# Altium PCB ECE315.PcbDoc (part 2 of 2)
Units mm, origin at the board's own origin, x right, y up, seen from the top; angles counter-clockwise.
Board outline 100.25 x 100.25 mm, 2 copper layers (Top Layer, Bottom Layer); 67 components, 52 nets, 224 pads, 194 vias.
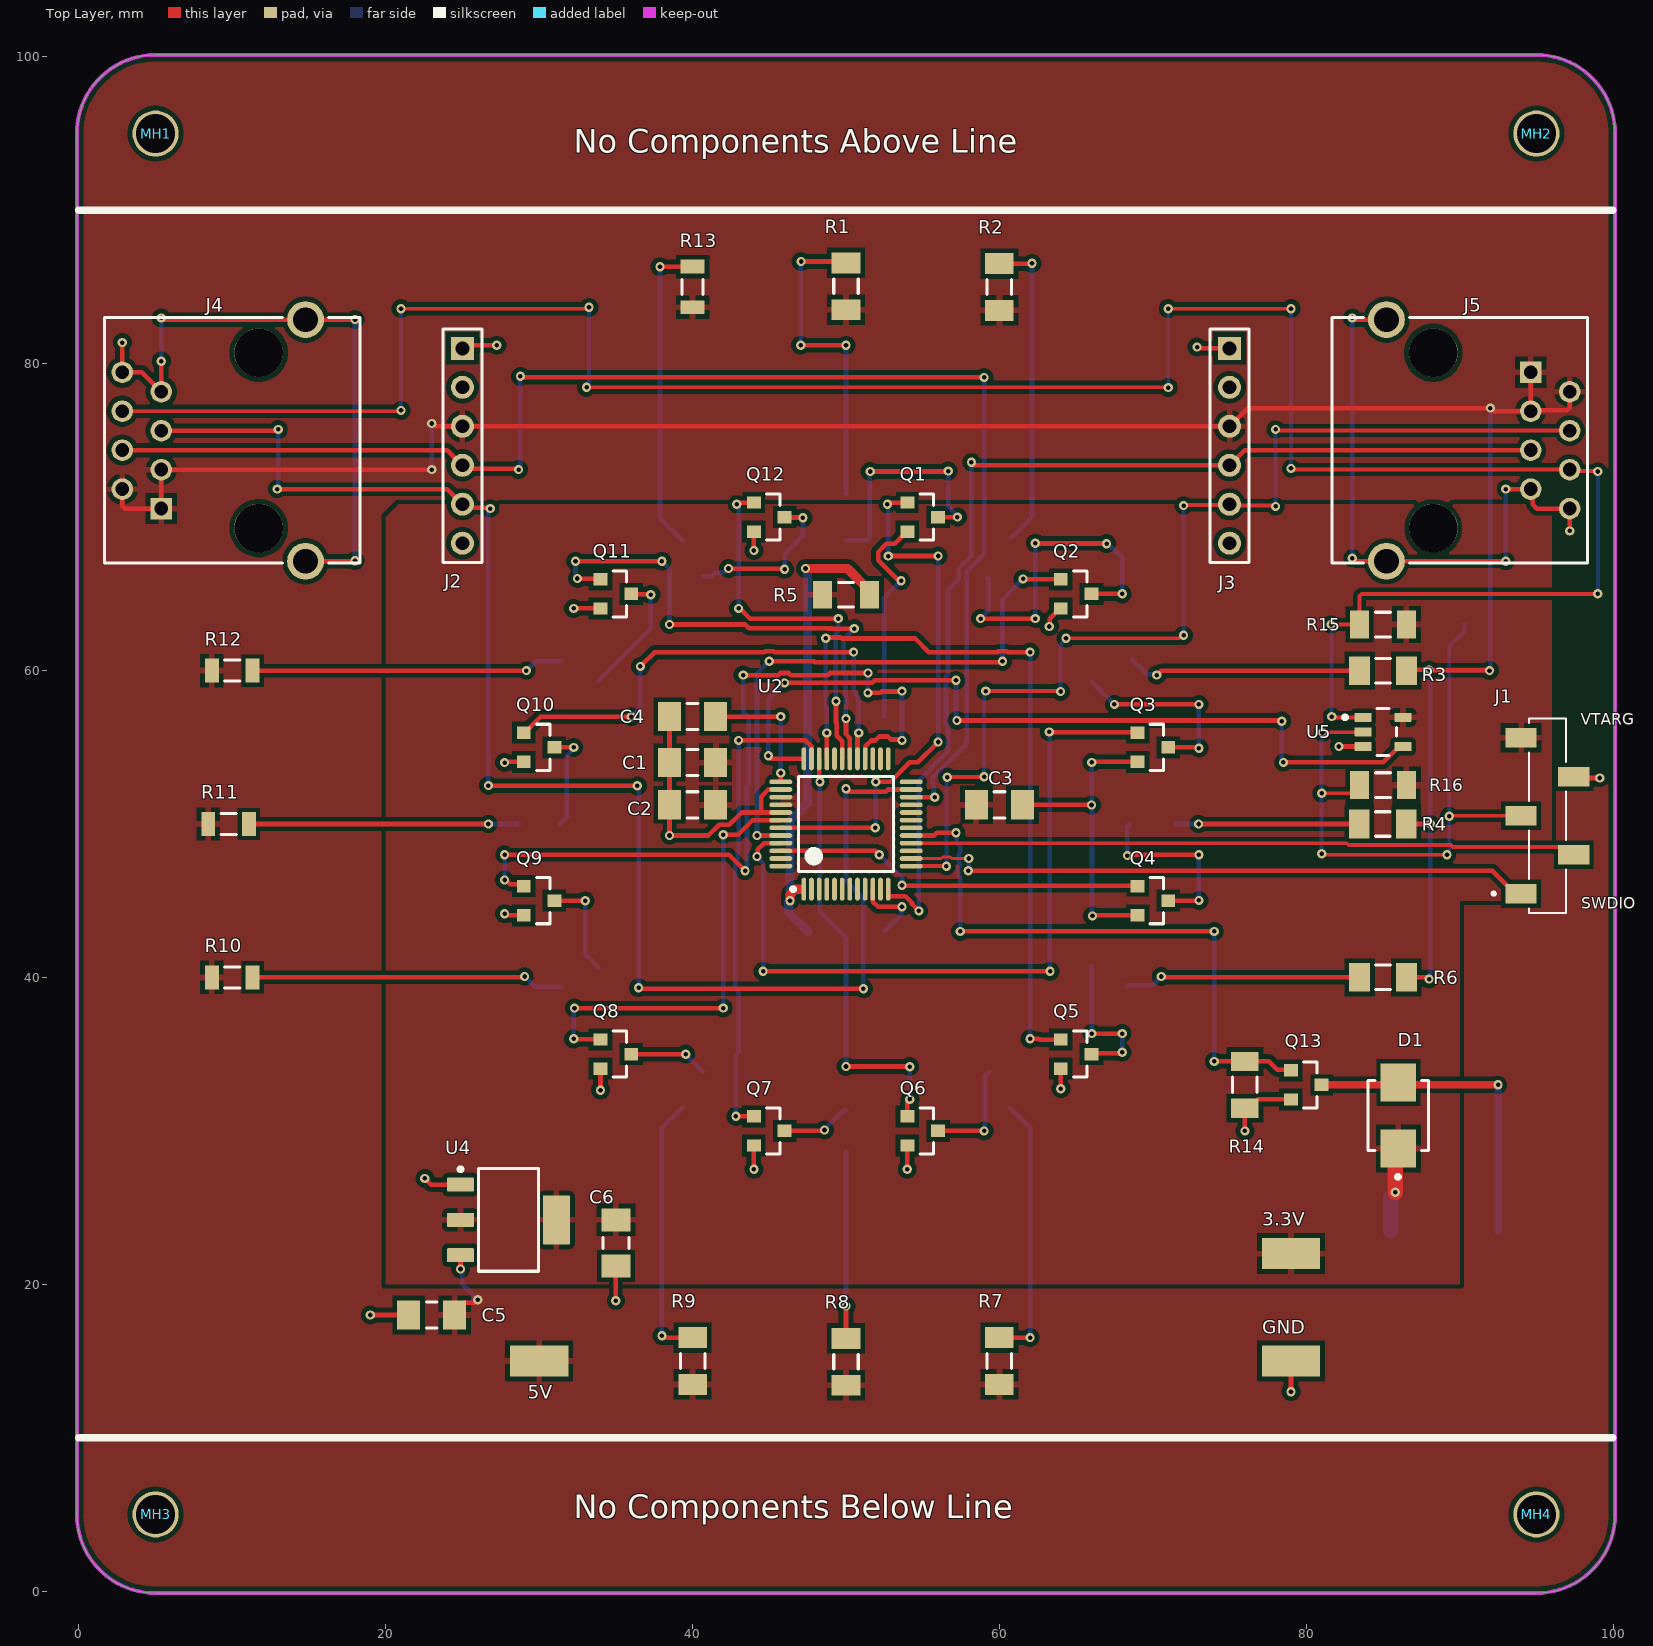
[diagram p0: Top Layer view]

## Via types
v1: diameter 0.6, hole 0.3, Top Layer to Bottom Layer, 194 vias

## Nets (pads, with @x,y where several pads share a name; then routed paths per layer and width w, separated by ;. In a path a pad name is that pad's centre, name@x,y a point inside that pad or via, vN(x,y) a via of type N, cw(c..) or ccw(c..) an arc to the next point about the centre after c; other vN are vias at no path point) (continued)
EN_Y2: (continued)
  Top Layer w0.3: U2.34 48.25,52.8 v1(48.3,52.75) ; v1(50,34.197) 54.137,34.197 v1(54.149,34.185) ; Q6.1 54,31.81 54.159,31.969 v1(54.159,32.05)
  Bottom Layer w0.3: v1(48.3,52.75) 48.3,44.295 50,42.595 v1(50,34.197) ; v1(54.149,34.185) 54.149,32.101 54.159,32.091 v1(54.159,32.05)
EN_Y3: Q7.1 U2.35 | length 31.7
  Top Layer w0.3: v1(42.824,30.95) Q7.1 ; v1(43,55.45) 47.357,55.45 47.75,55.057 U2.35
  Bottom Layer w0.3: v1(42.824,30.95) 42.824,34.946 43,35.122 43,39.037 42.774,39.263 42.774,47.555 42.95,47.731 42.95,48.269 43,48.319 v1(43,55.45)
EN_Y4: Q8.1 U2.42 | length 28.9
  Top Layer w0.3: v1(32.25,36) 32.275,35.975 33.975,35.975 Q8.1 ; v1(32.307,38) v1(42,38) ; v1(42,49.3) 42.958,49.3 43.908,50.25 U2.42
  Bottom Layer w0.3: v1(32.25,36) 32.25,37.943 v1(32.307,38) ; v1(42,38) v1(42,49.3)
GND: C1.1 C2.1 C3.1 C4.1 C5.1 C6.1 GND.1 J1.4 J2.1 J3.1 J4.7 J4.8 J4.S1 J4.S2 J5.7 J5.8 J5.S1 J5.S2 Q1.2 Q2.2 Q3.2 Q4.2 Q5.2 Q6.2 Q7.2 Q8.2 Q9.2 Q10.2 Q11.2 Q12.2 Q13.2 R14.1 SW1.1 U2.10 U2.38 U2.41 U3.1 U3.2 U4.1 U5.3 | length 173.3
  Top Layer w0.3: v1(2.835,81.375) J4.8 4.105,79.445 J4.7 v1(5.375,80.165) ; v1(5.375,82.986) 5.485,82.875 J4.S2 v1(18,82.875) ; J4.S1 17.966,67.125 v1(18,67.159) ; v1(19,18) C5.1 ; v1(22.55,26.9) 22.95,26.5 U4.1 ; J2.1 25.2,81.2 v1(27.243,81.2) ; v1(27.75,44.151) 27.851,44.05 Q9.2 ; v1(27.75,54) 27.8,54.05 Q10.2 ; v1(32.25,64.05) Q11.2 ; v1(34,32.65) Q8.2 ; v1(35,18.927) C6.1 ; C4.1 C1.1 C2.1 v1(38.5,49.25) 41.031,49.25 41.731,49.95 42.395,49.95 43.195,50.75 44.472,50.75 ; v1(44,27.5) Q7.2 ; v1(44,67.825) Q12.2 ; U2.41 44.472,50.75 ; U2.38 44.943,52.25 44.472,51.78 44.472,50.75 ; U2.10 51.75,44.943 52.083,44.61 v1(53.65,44.61) ; v1(53.593,65.852) 53.438,65.852 52.1,67.191 52.1,67.729 52.635,68.265 53.165,68.265 53.95,69.05 Q1.2 ; v1(53.99,27.5) 54,27.511 Q6.2 ; C3.1 65.991,51.25 v1(66,51.241) ; v1(63.25,62.874) 63.275,62.899 63.275,63.375 63.95,64.05 Q2.2 ; v1(64,32.75) Q5.2 ; v1(66.021,54.018) 66.054,54.05 Q3.2 ; v1(66.068,44.01) 66.107,44.05 Q4.2 ; v1(72.881,81.081) 72.961,81 J3.1 ; v1(76,30) R14.1 76.275,31.475 76.85,32.05 Q13.2 ; v1(79,13) GND.1 ; v1(82.123,55.05) U5.3 ; v1(83,67.322) 83.081,67.322 83.278,67.125 v1(93,67.125) ; v1(83,82.986) 83.111,82.875 J5.S1 ; v1(93,71.825) J5.7 94.757,71.693 94.757,70.825 95.027,70.555 J5.8 v1(97.165,69.099) ; J1.4 97.51,53 v1(99.119,53)
  Bottom Layer w0.3: v1(5.375,80.165) v1(5.375,82.986) ; v1(18,67.159) v1(18,82.875) ; U3.1 53.593,44.093 53.593,44.553 v1(53.65,44.61) ; U3.2 52.5,64.76 v1(53.593,65.852) ; v1(66.021,54.018) 66.011,54.007 66.011,51.252 v1(66,51.241) 66.034,51.208 66.034,44.044 v1(66.068,44.01) ; v1(83,67.322) v1(83,82.986) ; v1(93,67.125) v1(93,71.825)
"LED G1": LED_G1.2 R1.2 | length 21.1
  Top Layer w0.3: v1(47.045,81.2) v1(50,81.2) ; v1(47.073,86.66) 49.911,86.66 R1.2
  Bottom Layer w0.3: v1(47.045,81.2) 47.059,81.214 47.059,86.646 v1(47.073,86.66) ; LED_G1.2 v1(50,81.2)
"LED G2": LED_G2.2 R2.2 | length 20.6
  Top Layer w0.3: R2.2 62.105,86.526 v1(62.119,86.541)
  Bottom Layer w0.3: LED_G2.2 62.119,69.989 v1(62.119,86.541)
"LED G3": LED_G3.2 R3.2 | length 15.4
  Top Layer w0.3: v1(70.25,59.703) 70.547,60 R3.2
  Bottom Layer w0.3: LED_G3.2 69.612,59.757 70.195,59.757 v1(70.25,59.703)
"LED G4": LED_G4.2 R4.2 | length 12
  Top Layer w0.3: v1(72.98,50) R4.2
  Bottom Layer w0.3: LED_G4.2 v1(72.98,50)
"LED R1": LED_R1.1 R10.2 | length 20.5
  Top Layer w0.3: R10.2 28.99,40 v1(29.05,40.06)
  Bottom Layer w0.3: v1(29.05,40.06) 29.71,39.4 31.435,39.4 LED_R1.1
"LED R2": LED_R2.1 R11.2 | length 17.6
  Top Layer w0.3: R11.2 v1(26.695,50)
  Bottom Layer w0.3: v1(26.695,50) LED_R2.1
"LED R3": LED_R3.1 R12.2 | length 20.5
  Top Layer w0.3: R12.2 v1(29.169,60)
  Bottom Layer w0.3: v1(29.169,60) 29.769,60.6 31.435,60.6 LED_R3.1
"LED R4": LED_R4.1 R13.2 | length 20.6
  Top Layer w0.3: v1(37.881,86.32) 37.885,86.325 R13.2
  Bottom Layer w0.3: v1(37.881,86.32) 37.881,69.934 LED_R4.1
"LED Y1": LED_Y1.1 R6.2 | length 15.4
  Top Layer w0.3: v1(70.547,40.06) 70.608,40 R6.2
  Bottom Layer w0.3: LED_Y1.1 68.402,39.494 69.981,39.494 v1(70.547,40.06)
"LED Y2": LED_Y2.1 R7.2 | length 17.5
  Top Layer w0.3: R7.2 v1(62,16.526)
  Bottom Layer w0.3: LED_Y2.1 62,30.185 v1(62,16.526)
"LED Y3": LED_Y3.1 R8.2 | length 12.2
  Top Layer w0.3: R8.2 v1(50,18.587)
  Bottom Layer w0.3: v1(50,18.587) LED_Y3.1
"LED Y4": LED_Y4.1 R9.2 | length 17.5
  Top Layer w0.3: v1(38,16.645) 38.119,16.526 R9.2
  Bottom Layer w0.3: v1(38,16.645) 38,30.185 LED_Y4.1
"LEDQ G1": LED_G1.1 Q1.3 | length 15.5
  Top Layer w0.3: v1(51.574,72.975) 56.635,72.975 v1(56.66,73) ; Q1.3 v1(57.26,70)
  Bottom Layer w0.3: LED_G1.1 51.378,68.5 51.553,68.676 51.553,72.954 v1(51.574,72.975) ; v1(56.66,73) 56.66,70.673 57.26,70.073 v1(57.26,70)
"LEDQ G2": LED_G2.1 Q2.3 | length 21.8
  Top Layer w0.3: v1(58.771,63.388) v1(62.34,63.388) ; v1(62.34,68.3) 62.356,68.284 66.967,68.284 v1(66.983,68.268) ; Q2.3 v1(68,65)
  Bottom Layer w0.3: v1(58.771,63.388) 58.771,63.39 59.3,63.919 59.3,65.971 LED_G2.1 ; v1(62.34,63.388) v1(62.34,68.3) ; v1(66.983,68.268) 67.064,68.268 67.546,67.787 67.611,67.787 68,67.398 v1(68,65)
"LEDQ G3": LED_G3.1 Q3.3 | length 12.5
  Top Layer w0.3: v1(67.491,57.797) v1(73,57.797) ; Q3.3 72.941,55 v1(73,54.941)
  Bottom Layer w0.3: LED_G3.1 66.039,59.25 v1(67.491,57.797) ; v1(73,54.941) v1(73,57.797)
"LEDQ G4": LED_G4.1 Q4.3 | length 11.8
  Top Layer w0.3: v1(68.34,47.938) 68.402,48 v1(73,48) ; Q4.3 72.98,45 v1(73,45.02)
  Bottom Layer w0.3: v1(68.34,47.938) 68.34,49.84 LED_G4.1 ; v1(73,45.02) v1(73,48)
"LEDQ R1": LED_R1.2 Q9.3 | length 6.7
  Top Layer w0.3: Q9.3 v1(33,45)
  Bottom Layer w0.3: v1(33,45) 33,41.524 LED_R1.2
"LEDQ R2": LED_R2.2 Q10.3 | length 6.6
  Top Layer w0.3: Q10.3 32.241,55 v1(32.25,54.991)
  Bottom Layer w0.3: LED_R2.2 31.8,50.45 31.8,54.46 32.25,54.91 v1(32.25,54.991)
"LEDQ R3": LED_R3.2 Q11.3 | length 8.3
  Top Layer w0.3: Q11.3 36.028,64.972 37.253,64.972 v1(37.281,64.944)
  Bottom Layer w0.3: LED_R3.2 37.281,62.757 v1(37.281,64.944)
"LEDQ R4": LED_R4.2 Q12.3 | length 10.6
  Top Layer w0.3: v1(42.34,66.65) 42.365,66.625 45.975,66.625 v1(46,66.601) ; Q12.3 46.022,69.978 47.17,69.978 v1(47.192,69.955)
  Bottom Layer w0.3: LED_R4.2 41.242,66.151 41.475,66.384 41.993,66.384 42.259,66.65 v1(42.34,66.65) ; v1(46,66.601) 46,67.584 47.192,68.776 v1(47.192,69.955)
"LEDQ Y1": LED_Y1.2 Q5.3 | length 9.7
  Top Layer w0.3: Q5.3 66.068,35.068 67.943,35.068 v1(68,35.125) ; v1(66.021,36.34) v1(68,36.34)
  Bottom Layer w0.3: LED_Y1.2 66.021,40.736 v1(66.021,36.34) ; v1(68,35.125) v1(68,36.34)
"LEDQ Y2": LED_Y2.2 Q6.3 | length 7
  Top Layer w0.3: Q6.3 v1(59,30)
  Bottom Layer w0.3: v1(59,30) 59.057,30.057 59.057,33.581 LED_Y2.2
"LEDQ Y3": LED_Y3.2 Q7.3 | length 4.6
  Top Layer w0.3: Q7.3 48.543,30 v1(48.6,30.057)
  Bottom Layer w0.3: v1(48.6,30.057) 48.6,30.1 49.85,31.35 LED_Y3.2
"LEDQ Y4": LED_Y4.2 Q8.3 | length 5.2
  Top Layer w0.3: Q8.3 v1(39.55,35)
  Bottom Layer w0.3: v1(39.55,35) 39.55,34.959 40.661,33.849 LED_Y4.2
MCU_RST: J1.3 R16.1 SW1.2 U5.2 | length 41.7
  Top Layer w0.25: v1(81,48.057) 81.057,48 v1(89.168,48) ; v1(81,52) 82.975,52 83.475,52.5 R16.1 ; v1(81.057,55.95) 81.082,55.975 83.675,55.975 U5.2 ; v1(89.313,50.509) 89.345,50.54 J1.3
  Bottom Layer w0.25: v1(81,48.057) v1(81,52) 81,55.893 v1(81.057,55.95) ; v1(89.168,48) 89.313,48.145 v1(89.313,50.509) 89.313,61.563 90.3,62.55 SW1.2
SWD_CLK: J1.2 U2.16 | length 43.5
  Top Layer w0.25: U2.16 82.639,48.75 82.764,48.625 89.427,48.625 89.542,48.51 96.92,48.51 J1.2
SWD_DATA: J1.1 U2.14 | length 41.3
  Top Layer w0.2: U2.14 56.192,47.75 56.292,47.85 56.789,47.85 56.889,47.75 v1(58,47.75)
  Top Layer w0.305: v1(57.966,46.95) 92.13,46.95 93.62,45.46 J1.1
  Bottom Layer w0.305: v1(57.966,46.95) 58,46.984 v1(58,47.75)
SYS_RST: J4.6 J5.6 R15.1 U5.1 | length 159.3
  Top Layer w0.25: J4.6 20.952,76.905 v1(21,76.953) ; v1(21,83.586) 33.161,83.586 v1(33.25,83.675) ; v1(33.091,78.46) 70.985,78.46 v1(71,78.445) ; v1(71,83.586) v1(79,83.586) ; v1(79,73.179) 79.084,73.095 J5.6 97.26,73 98.975,73 v1(99,72.975) ; v1(81.617,63) R15.1 83.475,64.854 83.621,65 v1(99,65) ; v1(81.657,57) 81.707,56.95 U5.1
  Bottom Layer w0.25: v1(21,76.953) v1(21,83.586) ; v1(33.091,78.46) 33.25,78.619 v1(33.25,83.675) ; v1(71,78.445) v1(71,83.586) ; v1(79,73.179) v1(79,83.586) ; v1(81.617,63) 81.637,62.98 81.637,57.02 v1(81.657,57) ; v1(99,65) v1(99,72.975)
UART0_RX: J2.4 J4.4 U2.22 | length 93.1
  Top Layer w0.3: J4.4 24.015,74.365 J2.4 25.228,73.152 28.603,73.152 v1(28.661,73.095) ; v1(28.78,79.175) 28.845,79.11 58.995,79.11 v1(59,79.105) ; U2.22 v1(55.779,51.75)
  Bottom Layer w0.3: v1(28.661,73.095) 28.78,73.214 v1(28.78,79.175) ; v1(55.779,51.75) 55.722,51.807 55.722,52.489 55.66,52.551 55.66,53.034 57.857,55.231 57.857,56.455 57.876,56.474 57.876,57.013 57.857,57.032 57.857,66.473 59,67.615 v1(59,79.105)
UART0_TX: J2.5 J4.5 U2.23 | length 99.6
  Top Layer w0.3: J4.5 12.915,75.635 v1(13,75.72) ; v1(12.927,71.825) 24.015,71.825 J2.5 25.228,70.612 26.757,70.612 v1(26.814,70.555) ; v1(26.695,52.5) 26.706,52.489 v1(36.4,52.489) ; v1(36.481,39.325) 36.538,39.268 36.739,39.268 36.744,39.263 v1(51.136,39.263) ; v1(50,52.291) 50.191,52.1 52.587,52.1 52.737,52.25 U2.23
  Bottom Layer w0.3: v1(12.927,71.825) 13,71.898 v1(13,75.72) ; v1(26.695,52.5) 26.695,70.436 v1(26.814,70.555) ; v1(36.4,52.489) 36.481,52.408 v1(36.481,39.325) ; v1(50,52.291) 50,46.305 51.136,45.168 v1(51.136,39.263)
UART1_RX: J3.4 J5.5 U2.12 | length 70.6
  Top Layer w0.3: U2.12 52.75,45.3 53.88,45.3 54.3,44.88 54.3,44.784 v1(54.749,44.335) ; v1(58.171,73.575) 58.366,73.38 J3.4 75.985,74.365 J5.5
  Bottom Layer w0.3: v1(54.749,44.335) 54.749,52.83 56.65,54.731 56.65,56.4 56.519,56.531 56.519,59.632 56.65,59.763 56.65,65.265 57.357,65.973 57.357,66.68 58.171,67.493 v1(58.171,73.575)
UART1_TX: J3.5 J5.4 U2.13 | length 71.2
  Top Layer w0.254: U2.13 v1(56.541,47.25) ; v1(56.598,53.052) 56.609,53.063 58.989,53.063 v1(59,53.074) ; v1(59.111,58.66) 63.964,58.66 v1(63.989,58.635) ; v1(64.34,62.106) 71.715,62.106 71.906,62.297 v1(72,62.297) ; v1(72,70.749) 72.045,70.795 74.955,70.795 J3.5 75.072,70.768 77.934,70.768 v1(78,70.702) ; v1(78,75.72) 78.085,75.635 J5.4
  Bottom Layer w0.254: v1(56.541,47.25) 56.541,52.995 v1(56.598,53.052) ; v1(59,53.074) 59,58.549 v1(59.111,58.66) ; v1(63.989,58.635) 63.989,61.662 64.34,62.012 v1(64.34,62.106) ; v1(72,62.297) v1(72,70.749) ; v1(78,70.702) v1(78,75.72)
VCCD: C4.2 U2.37 | length 8.5
  Top Layer w0.3: C4.2 v1(45.75,57) ; U2.37 v1(45.75,53.326)
  Bottom Layer w0.3: v1(45.75,53.326) v1(45.75,57)
XRES: U2.36 U5.4 | length 53.6
  Top Layer w0.3: v1(44.943,54.441) 45.134,54.25 U2.36 ; v1(46,59.194) 51.703,59.194 51.872,59.363 v1(57.169,59.363) ; v1(57.226,56.743) 78.358,56.743 v1(78.4,56.701) ; v1(78.509,54.018) 85.018,54.018 86.05,55.05 U5.4
  Bottom Layer w0.3: v1(44.943,54.441) 44.943,58.137 v1(46,59.194) ; v1(57.169,59.363) 57.169,56.801 v1(57.226,56.743) ; v1(78.4,56.701) 78.4,54.126 v1(78.509,54.018)
pads on no net: J2.2 J2.6 J3.2 J3.6 J4.MH1 J4.MH2 J5.MH1 J5.MH2 LS1.M1 LS1.M2 MH1.1 MH2.1 MH3.1 MH4.1 U2.2 U2.3 U2.4 U2.5 U2.6 U2.7 U2.8 U2.9 U2.11 U2.15 U2.18 U2.19 U2.20 U2.24 U2.25 U2.26 U2.27 U2.32 U2.47 U2.48

## Polygon pours and split planes (outlines as drawn)
5.0V on Top Layer "T_5V" (solid, remove dead copper, pour order 1): 97,100 100,97 100,3 97,0 3,0 0,3 0,97 3,100
3.3V on Top Layer "T_3V3" (solid, remove dead copper, pour order 0): 20,70 20.84,70.84 96,70.84 96,46 95,45 90,45 90,20 20,20
GND on Bottom Layer "B_GND" (solid, remove dead copper, pour order 4): 97,100 100,97 100,3 97,0 3,0 0,3 0,97 3,100 5,100

## Keep-outs
Keep-Out Layer:
  lines w0.254: 4.999,100.127 ccw(c5,95) -0.119,95.296 -0.127,95.25 -0.127,4.999 ccw(c5,5) 5,-0.127 95,-0.127 ccw(c95,5) 100.127,5 100.127,95 ccw(c95,95) 95.001,100.127 95,100.127 5,100.127 ; 4.999,100.127 5,100.127

## Silkscreen, mask and mechanical layers (free items; w line width, h text height)
Top Overlay:
  lines w0.5: 0,10 99.961,10 ; 0,90 99.961,90
  text "No Components Above Line" at 32.254,93.762 h1.52
  text "VTARG" at 97.887,56.22 h1.27
  text "SWDIO" at 97.931,44.22 h1.27
  text "No Components Below Line" at 32.254,4.762 h1.52
Bottom Overlay:
  circle w2.54: c50,50 r26.747
  text "M Sadman Sakib" at 3.958,55 h4 r90
  text "Section 006" at 6.958,52 h4 r90
Mechanical 2:
  lines w0.254: 0,5 ccw(c5,5) 5,0 95,0 ccw(c95,5) 100,5 100,95 ccw(c95,95) 95,100 5,100 ccw(c5,95) 0,95 0,5

## Dimensions
0,5 to 100,5 on Mechanical 1

## Text inside footprints (layer, text, board x,y; h text height)
LS1: Mechanical 10 "M Sadman Sakib" at 82.015,11.11 h1.52 r270
U1: Bottom Overlay "ECE 315" at 13.794,13.492 h1.02
U2: Mechanical 10 "M Sadman Sakib" at 57.493,40.729 h1.52 r90